# Altium PCB 转接板V01.PcbDoc
Units mil, origin at the board's own origin, x right, y up, seen from the top; angles counter-clockwise.
Board outline 1410.33 x 2920.34 mil, 2 copper layers (Top Layer, Bottom Layer); 8 components, 18 nets, 83 pads, 0 vias.
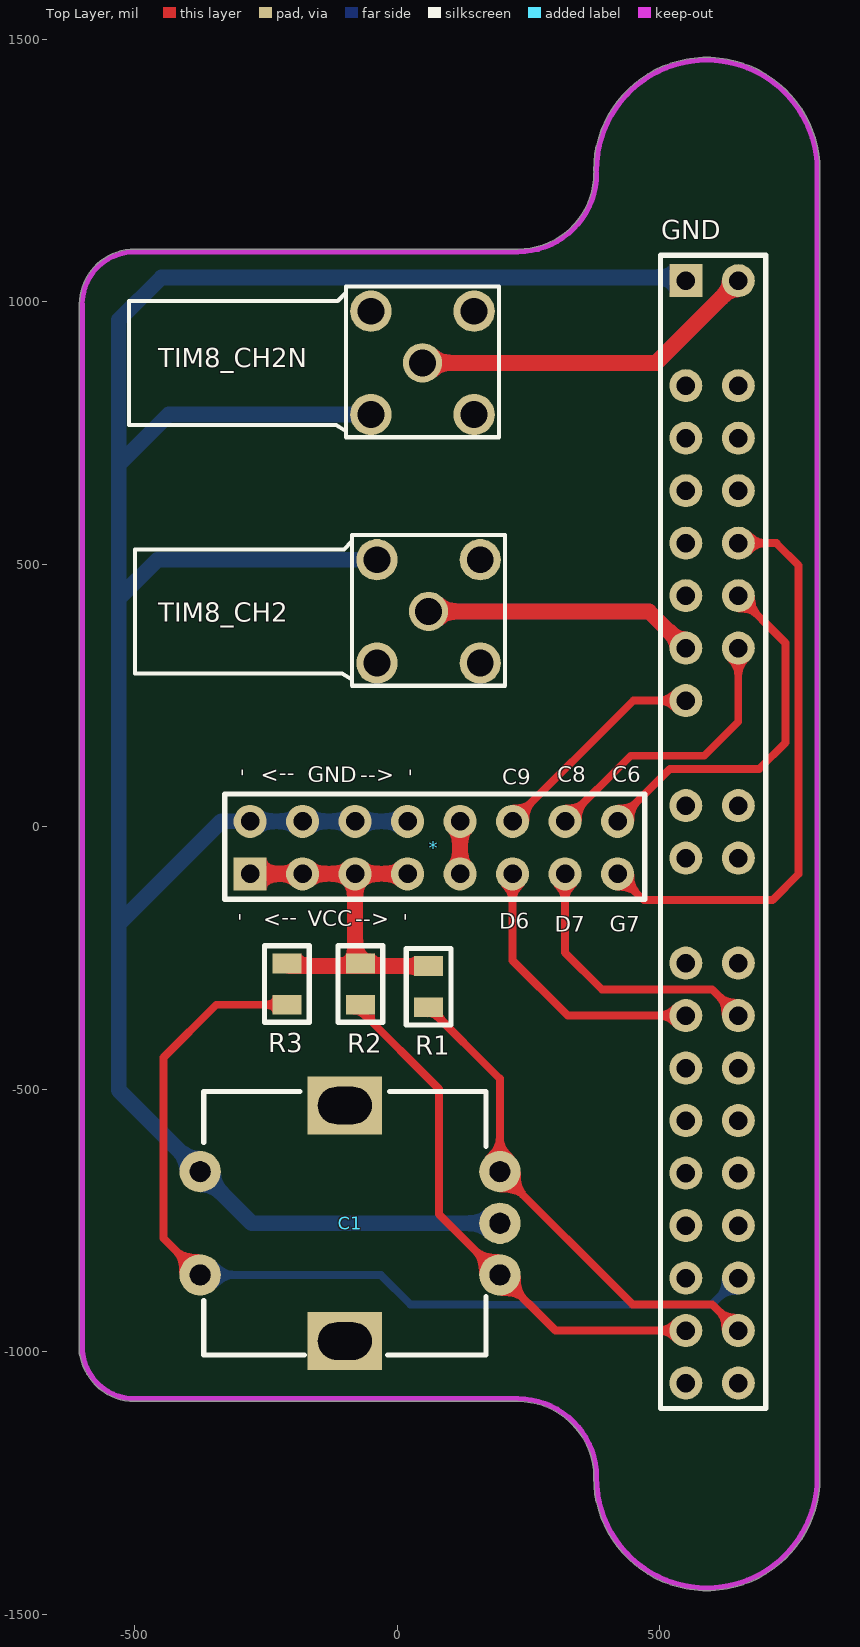
[diagram p0: Top Layer view]
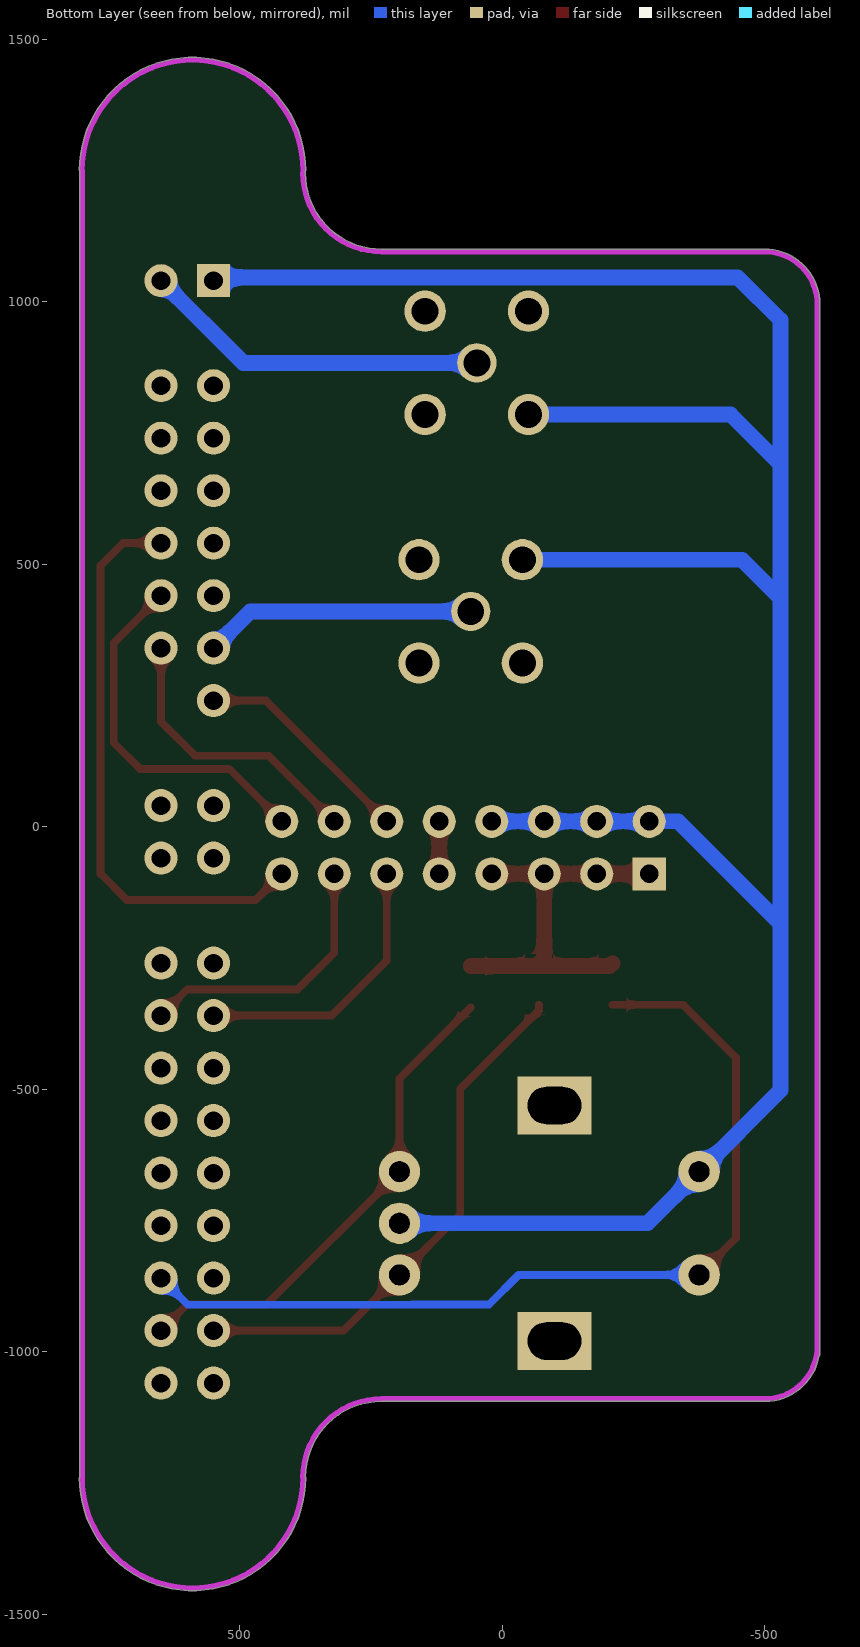
[diagram p1: Bottom Layer view, seen from below]
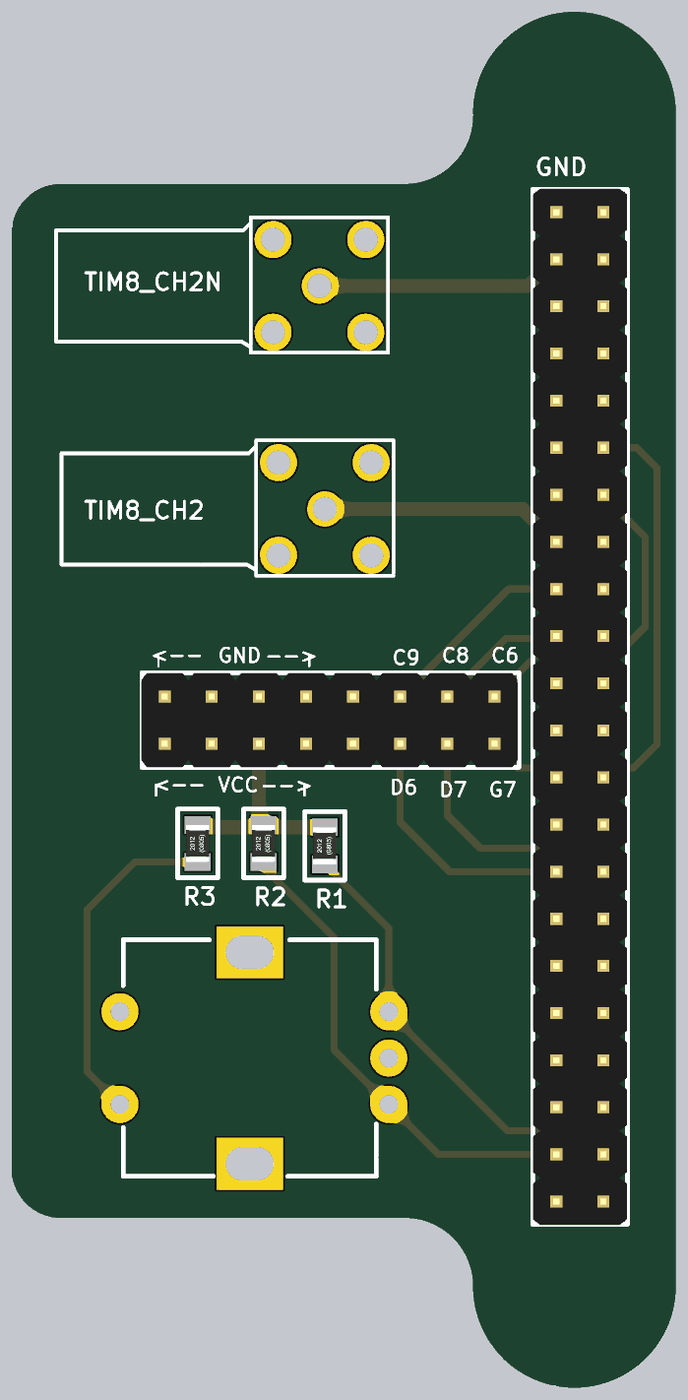
[diagram p2: 3D render of the assembled board from above, using the file's embedded part models]

## Layer stack, top to bottom
Top Solder: solder mask 0.4, Solder Resist, Dk 3.5
Top Layer: signal copper 1.4
Dielectric 1: dielectric 12.6, FR-4, Dk 4.8
Bottom Layer: signal copper 1.4
Bottom Solder: solder mask 0.4, Solder Resist, Dk 3.5

## Board outline
-603.33,-1008.75 ccw(c-500,-990) -500,-1095.02 230,-1095.02 cw(c230,-1240) 374.98,-1238.33 ccw(c379.7,-1240) 374.69,-1240 ccw(c590,-1240) 805.31,-1240 ccw(c800.3,-1240) 805.01,-1238.3 805.01,1248.3 ccw(c800.3,1250) 805.31,1250 ccw(c590,1250) 374.69,1250 ccw(c379.7,1250) 375.51,1247.24 ccw(c380,1245) 374.99,1245 cw(c230,1245) 230,1100.02 -500,1100.02 ccw(c-500,995) -605.01,995 -605.01,-1005 ccw(c-600,-1005)

## Design rules (kind name [scope] priority, off if disabled: settings)
Clearance [All] p1: gap=10
PolygonConnect [All] p1: connectstyle=Relief reliefconductorwidth=10 reliefentries=4 polygonreliefangle="90 Angle" airgapwidth=10
RoutingVias [All] p1: holewidth=28 width=50 viastyle="Through Hole" minholewidth=28 minwidth=50 maxholewidth=28 maxwidth=50
ShortCircuit [All] p1: allowed=TRUE
SolderMaskExpansion [All] p1: expansion=4
Width [All] p1: maxlimit=100 minlimit=15 preferedwidth=20
29 further rules are at their usual default settings.

## Components (designator, comment, footprint, x,y, rotation, side; value= is the part's Value field where it differs from the comment)
* "Header2.54_2X8" "Header 2.54_2X8" 70,-40 r0 top
C1 "Coder" Coder -120,-750 r90 top
GND "Left_out" Header2.54_2X22 590,90 r270 top
R1 "RES_0805" 0805_R 60,-305 r90 top
R2 "RES_0805" 0805_R -70,-300 r90 top
R3 "RES_0805" 0805_R -210,-300 r90 top
TIM8_CH2 "SMA" SMA 158.43,311.57 r180 top
TIM8_CH2N "SMA" SMA 146.85,785 r180 top

## Footprints (in the part's own frame and the unit in brackets; to place one, negate y for a bottom-side part, rotate by r counter-clockwise, add the part's x,y. Pads: shape width x height; smd on the part's side, far side on the other; paste and mask are expansions set on the pad)
0805_R [mm]
  rect 0.95x1.4 smd: 1(-1,0) 2(1,0)
  silkscreen extent -1.85,-1.08 1.85,1.08, body extent -1,-0.62 1,0.63, height 0.45
Coder [mm]
  rect 2.8x3.6 hole 1.8 slot 2.6 at 90 deg: 0(-5.842,-0.521) 0(5.558,-0.521)
  round 2 hole 1 slot 1.005 at 0 deg: 1(-2.642,6.48) 2(2.357,6.48) 3(2.357,-8.021) 4(-0.142,-8.021) 5(-2.642,-8.021)
  silkscreen extent -6.52,-7.35 6.23,6.3
Header2.54_2X22 [mm]
  rect 1.6x1.6 hole 0.9: 1(-24.13,-1.016)
  round 0 all layers, no hole: 2(-21.59,-1.016) 10(-1.27,-1.016) 13(6.35,-1.016) 32(6.35,1.524) 35(-1.27,1.524) 36(-3.81,1.524) 43(-21.59,1.524)
  round 1.6 hole 0.9: 3(-19.05,-1.016) 4(-16.51,-1.016) 5(-13.97,-1.016) 6(-11.43,-1.016) 7(-8.89,-1.016) 8(-6.35,-1.016) 9(-3.81,-1.016) 11(1.27,-1.016) 12(3.81,-1.016) 14(8.89,-1.016) 15(11.43,-1.016) 16(13.97,-1.016) 17(16.51,-1.016) 18(19.05,-1.016) 19(21.59,-1.016) 20(24.13,-1.016) 21(26.67,-1.016) 22(29.21,-1.016) 23(29.21,1.524) 24(26.67,1.524) 25(24.13,1.524) 26(21.59,1.524) 27(19.05,1.524) 28(16.51,1.524) 29(13.97,1.524) 30(11.43,1.524) 31(8.89,1.524) 33(3.81,1.524) 34(1.27,1.524) 37(-6.35,1.524) 38(-8.89,1.524) 39(-11.43,1.524) 40(-13.97,1.524) 41(-16.51,1.524) 42(-19.05,1.524) 44(-24.13,1.524)
  silkscreen extent -25.36,-2.25 30.44,2.85, body extent -25.4,-2.25 30.48,2.83, height 8.6
"Header 2.54_2X8" [mm]
  rect 1.6x1.6 hole 0.9: 1(-8.89,-1.27)
  round 1.6 hole 0.9: 2(-6.35,-1.27) 3(-3.81,-1.27) 4(-1.27,-1.27) 5(1.27,-1.27) 6(3.81,-1.27) 7(6.35,-1.27) 8(8.89,-1.27) 9(8.89,1.27) 10(6.35,1.27) 11(3.81,1.27) 12(1.27,1.27) 13(-1.27,1.27) 14(-3.81,1.27) 15(-6.35,1.27) 16(-8.89,1.27)
  silkscreen extent -10.12,-2.5 10.21,2.6, body extent -10.16,-2.5 10.16,2.58, height 8.6
SMA [mm]
  round 2 hole 1.3: 0(0,0) 0(0,-5) 0(5,0) 0(5,-5)
  round 1.9 hole 1.3: 1(2.5,-2.5)
  silkscreen extent -1.2,-6.2 16.7,1.1

## Part data
R1 R2 R3: "贴片电阻，0805封装"

## Nets (pads, with @x,y where several pads share a name; then routed paths per layer and width w, separated by ;. In a path a pad name is that pad's centre, name@x,y a point inside that pad or via, vN(x,y) a via of type N, cw(c..) or ccw(c..) an arc to the next point about the centre after c; other vN are vias at no path point)
A: C1.5 GND.21 R2.1 | length 1022.8
  Top Layer w15: R2.1 -70,-350 80,-500 80,-738.2 C1.5 301.8,-960 GND.21
B: C1.3 GND.24 R1.1 | length 948.7
  Top Layer w15: R1.1 195.8,-480.17 C1.3 448.6,-910 600,-910 GND.24
ELECT: *.5 *.12 | length 100
  Top Layer w30: *.5 *.12
GND: *.13 *.14 *.15 *.16 C1.2 C1.4 GND.1 TIM8_CH2.0@-38.43,508.43 TIM8_CH2N.0@-50,785 | length 5090
  Bottom Layer w30: TIM8_CH2N.0@-50,785 -435,785 -530,690 ; TIM8_CH2.0@-38.43,508.43 -456.57,508.43 -530,435 ; *.13 *.14 *.15 *.16 -335,10 -530,-185 ; C1.4 -276.7,-755.6 C1.2 -530,-502.3 -530,-185 ; GND.1 550,1046.22 -448.78,1046.22 -530,965 -530,690 ; -530,-185 -530,435 ; -530,435 -530,690
KEY: C1.1 GND.25 R3.1 | length 1789.4
  Top Layer w15: C1.1 -445,-784.1 -445,-440 -344.37,-339.37 R3.1
  Bottom Layer w15: C1.1 -31,-854 25,-910 171.37,-910 172.24,-910.87 599.13,-910.87 GND.25
PC7: *.9 GND.38 | length 699.4
  Top Layer w15: *.9 520,110 690,110 740,160 740,350 GND.38
PC8: *.10 GND.37 | length 548.7
  Top Layer w15: *.10 445,135 585,135 650,200 GND.37
PC9: *.11 GND.9 | length 425.3
  Top Layer w15: *.11 450,240 GND.9
PC10: GND.34
PC11: GND.12
PC12: GND.33
PD6: *.6 GND.15 | length 538.5
  Top Layer w15: *.6 220,-255 325,-360 GND.15
PD7: *.7 GND.30 | length 529.7
  Top Layer w15: *.7 320,-240 390,-310 600,-310 GND.30
PG6: GND.6
PG7: *.8 GND.39 | length 1106.5
  Top Layer w15: *.8 470,-140 715,-140 765,-90 765,497.5 722.5,540 GND.39
TIM8_CH2: GND.8 TIM8_CH2.1 | length 1038
  Top Layer w30: TIM8_CH2.1 480,410 GND.8
  Bottom Layer w30: TIM8_CH2.1 480,410 GND.8
TIM8_CH2N: GND.44 TIM8_CH2N.1 | length 1332.9
  Top Layer w30: TIM8_CH2N.1 493.43,883.43 GND.44
  Bottom Layer w30: TIM8_CH2N.1 493.43,883.43 GND.44
VCC: *.1 *.2 *.3 *.4 R1.2 R2.2 R3.2 | length 746.8
  Top Layer w30: *.1 *.2 *.3 ; R3.2 -205,-265.63 R1.2 ; R2.2 -80,-250.63 *.3 ; *.4 *.3
pads on no net: C1.0 GND.2 GND.3 GND.4 GND.5 GND.7 GND.10 GND.11 GND.13 GND.14 GND.16 GND.17 GND.18 GND.19 GND.20 GND.22 GND.23 GND.26 GND.27 GND.28 GND.29 GND.31 GND.32 GND.35 GND.36 GND.40 GND.41 GND.42 GND.43 TIM8_CH2.0@158.43,311.57 TIM8_CH2.0@158.43,508.43 TIM8_CH2.0@-38.43,311.57 TIM8_CH2N.0@146.85,785 TIM8_CH2N.0@146.85,981.85 TIM8_CH2N.0@-50,981.85

## Keep-outs
Keep-Out Layer:
  lines w10: -600,-1005 -600,995 cw(c-500,995) -500,1095 230,1095 ccw(c230,1245) 380,1245 ; -600,-990 ccw(c-500,-990) -500,-1090 230,-1090 cw(c230,-1240) 380,-1240 ; 379.7,-1240 ccw(c590,-1240) 800.3,-1240 ; 379.7,1250 cw(c590,1250) 800.3,1250 ; 800,-1250 800,1250

## Silkscreen, mask and mechanical layers (free items; w line width, h text height)
Top Overlay:
  text "-" at -305,110 h30 r270
  text "-->" at -195,110 h30 r180
  text "-" at 15,110 h30 r270
  text "GND" at -170,85 h30
  text "-->" at -70,85 h30
  text "C8" at 305,85 h30
  text "C6" at 410,85 h30
  text "C9" at 200,80 h30
  text "-" at -310,-165 h30 r270
  text "-->" at -190,-165 h30 r180
  text "-" at 5,-165 h30 r270
  text "VCC" at -170,-190 h30
  text "-->" at -80,-190 h30
  text "D6" at 195,-195 h30
  text "D7" at 300,-200 h30
  text "G7" at 405,-200 h30
Bottom Solder:
  drawing of 1177 lines, arcs and shapes, not listed